# Altium PCB Christmas_PCB_V2.PcbDoc
Units mm, origin at the board's own origin, x right, y up, seen from the top; angles counter-clockwise.
Board outline 38.15 x 54.78 mm, 2 copper layers (Top Layer, Bottom Layer); 21 components, 22 nets, 51 pads, 9 vias.
Unrouted connection lines stored in the file: 9.
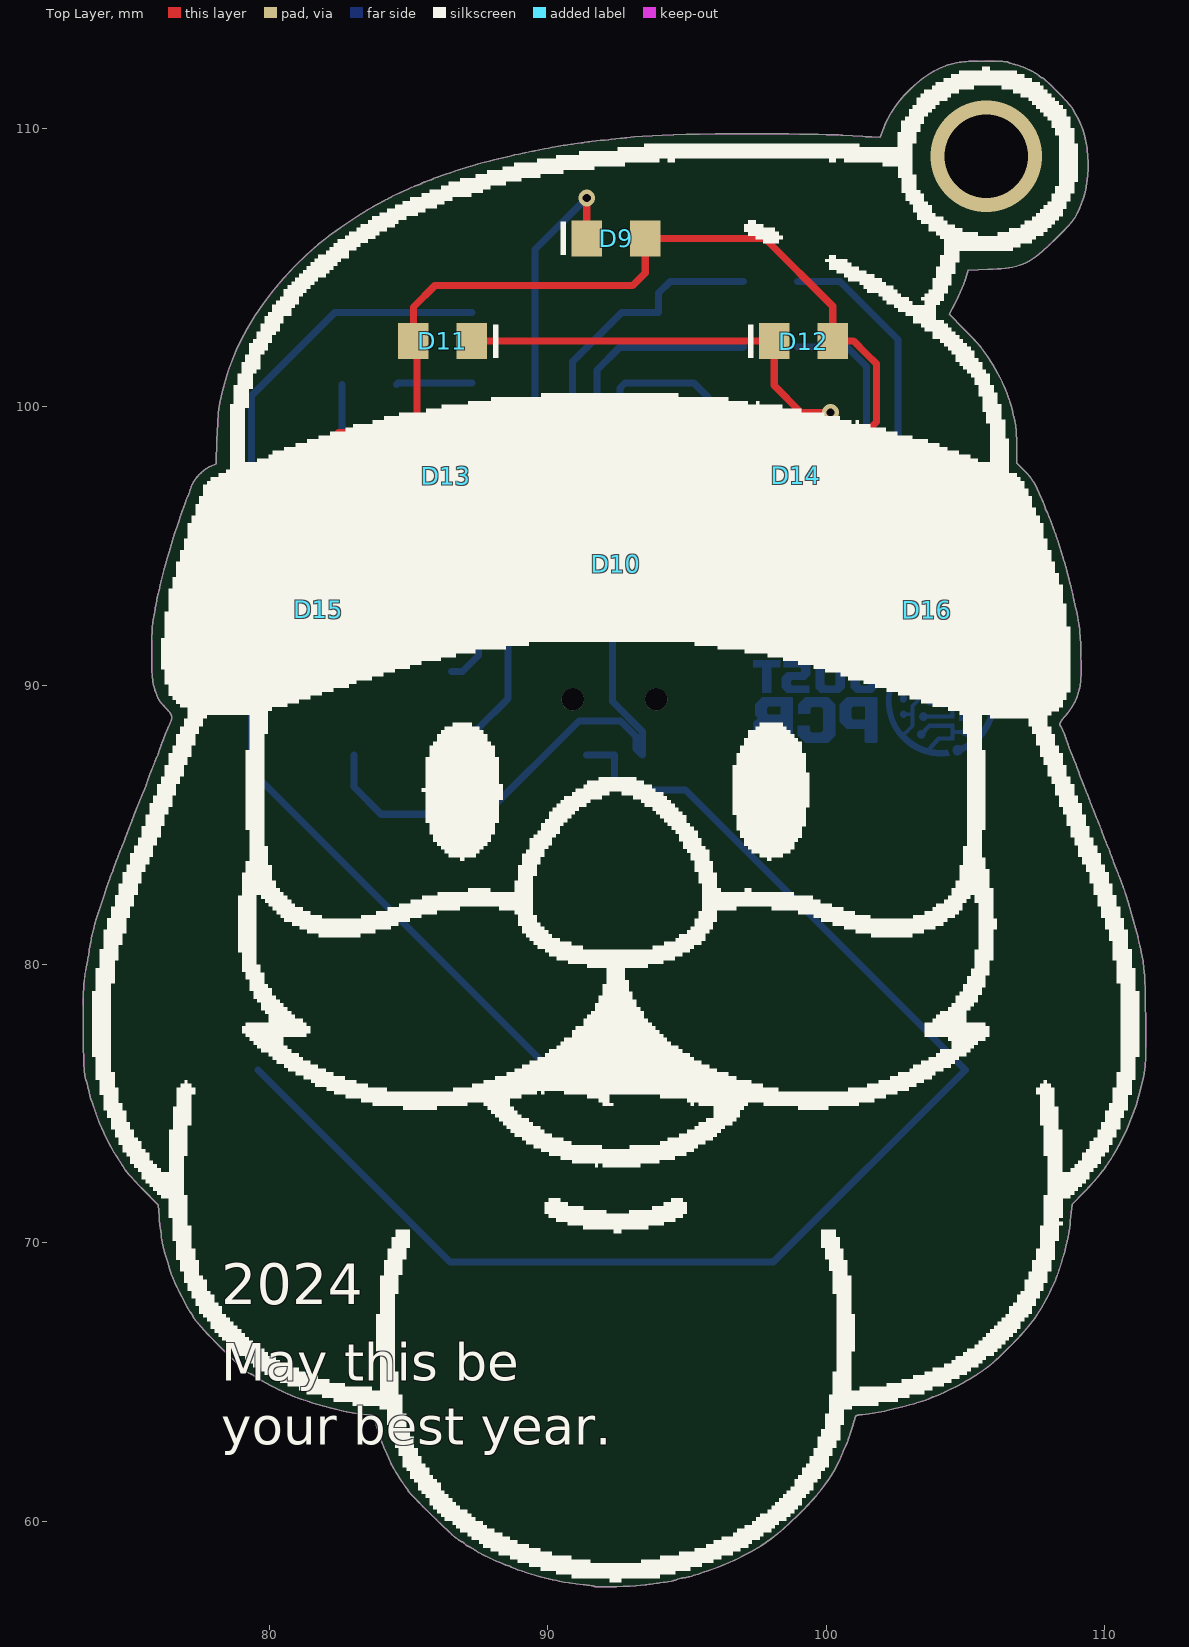
[diagram p0: Top Layer view]
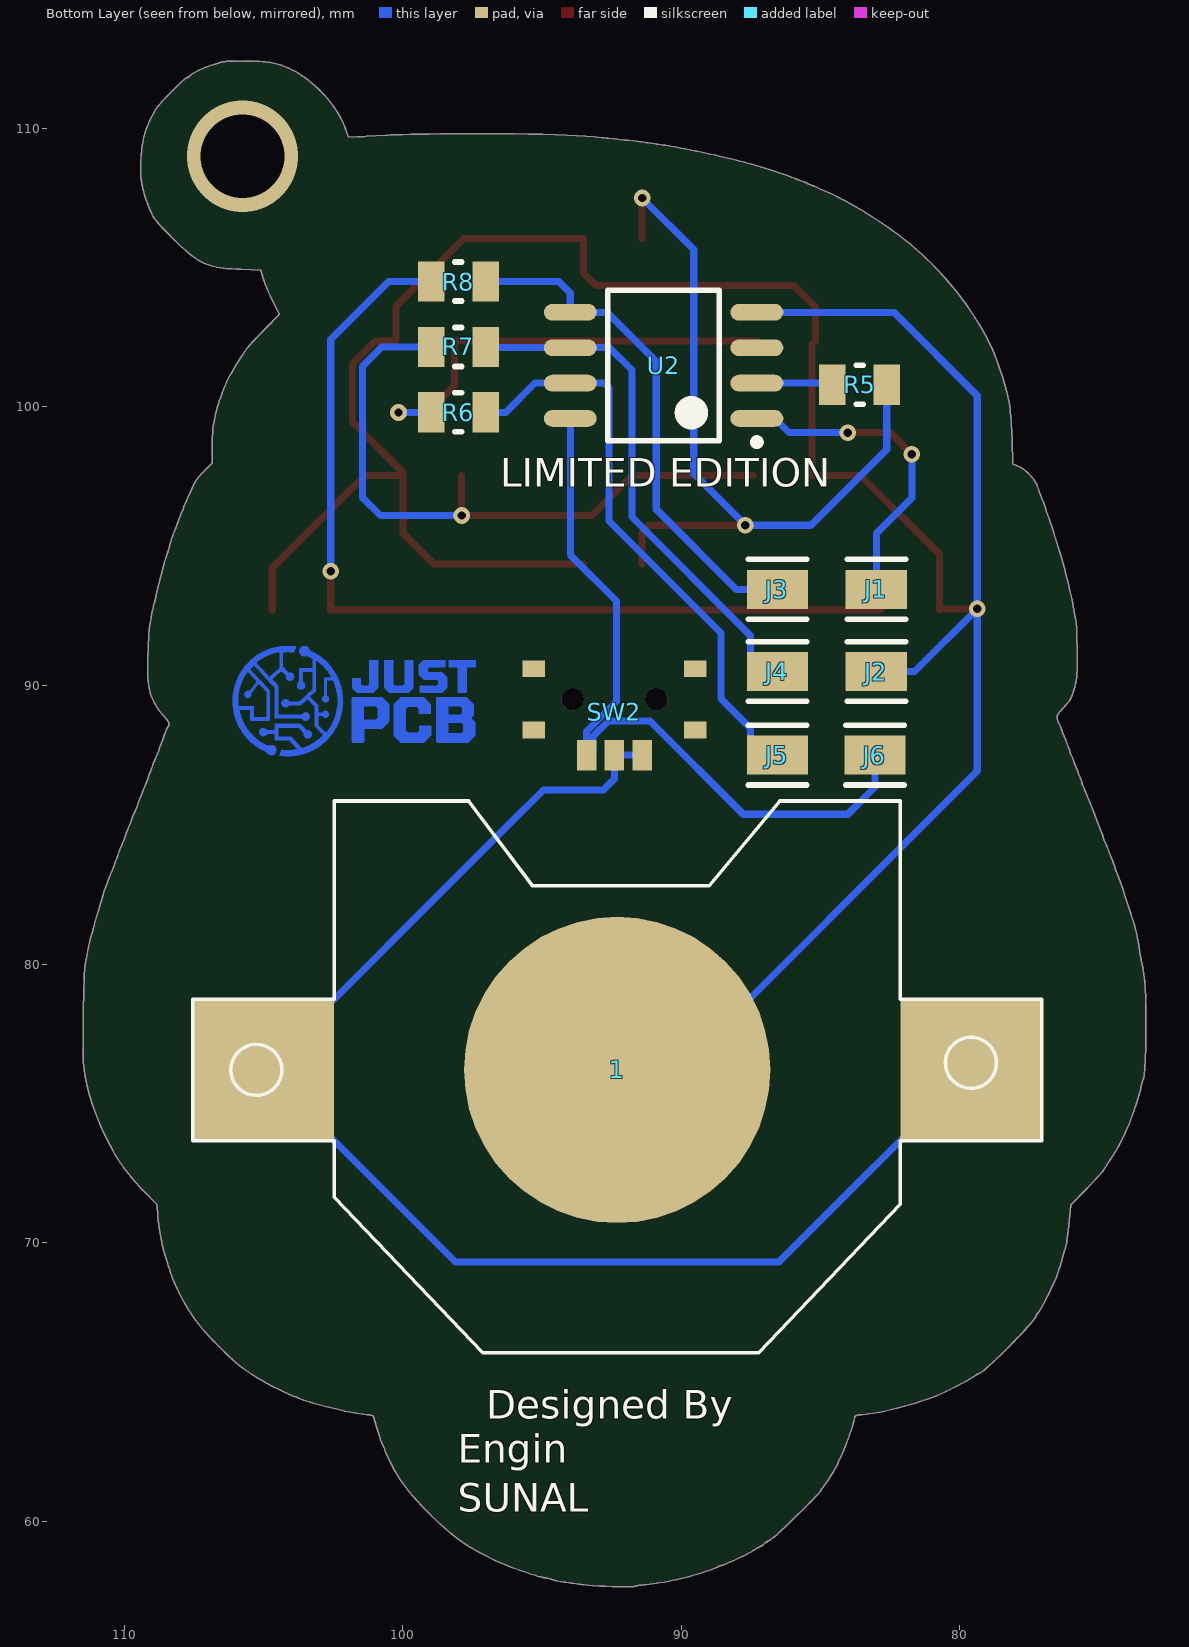
[diagram p1: Bottom Layer view, seen from below]
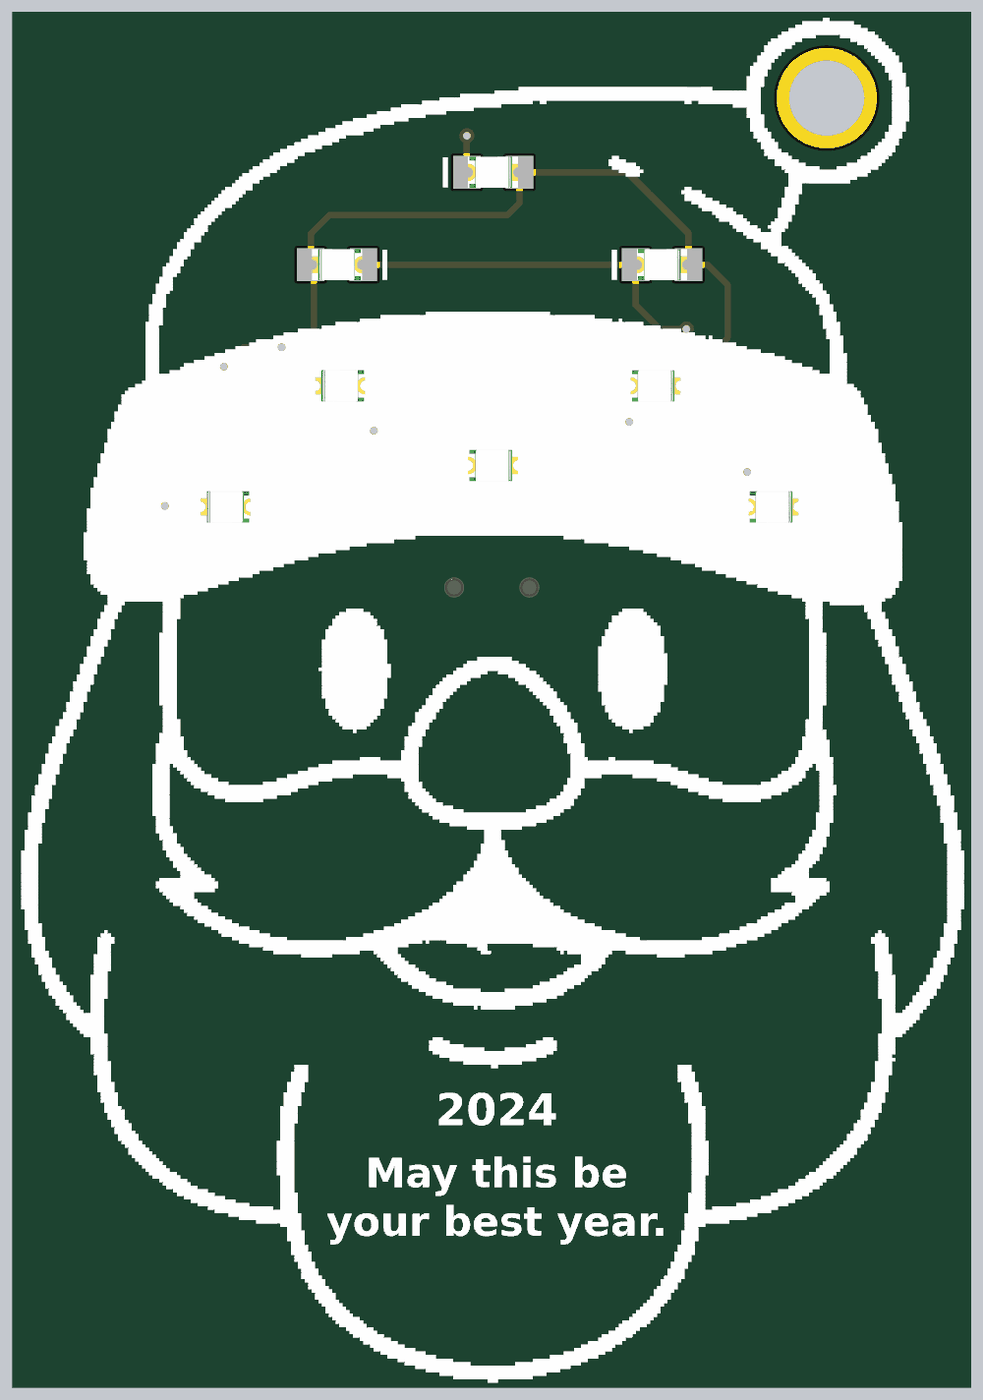
[diagram p2: 3D render of the assembled board from above, using the file's embedded part models]
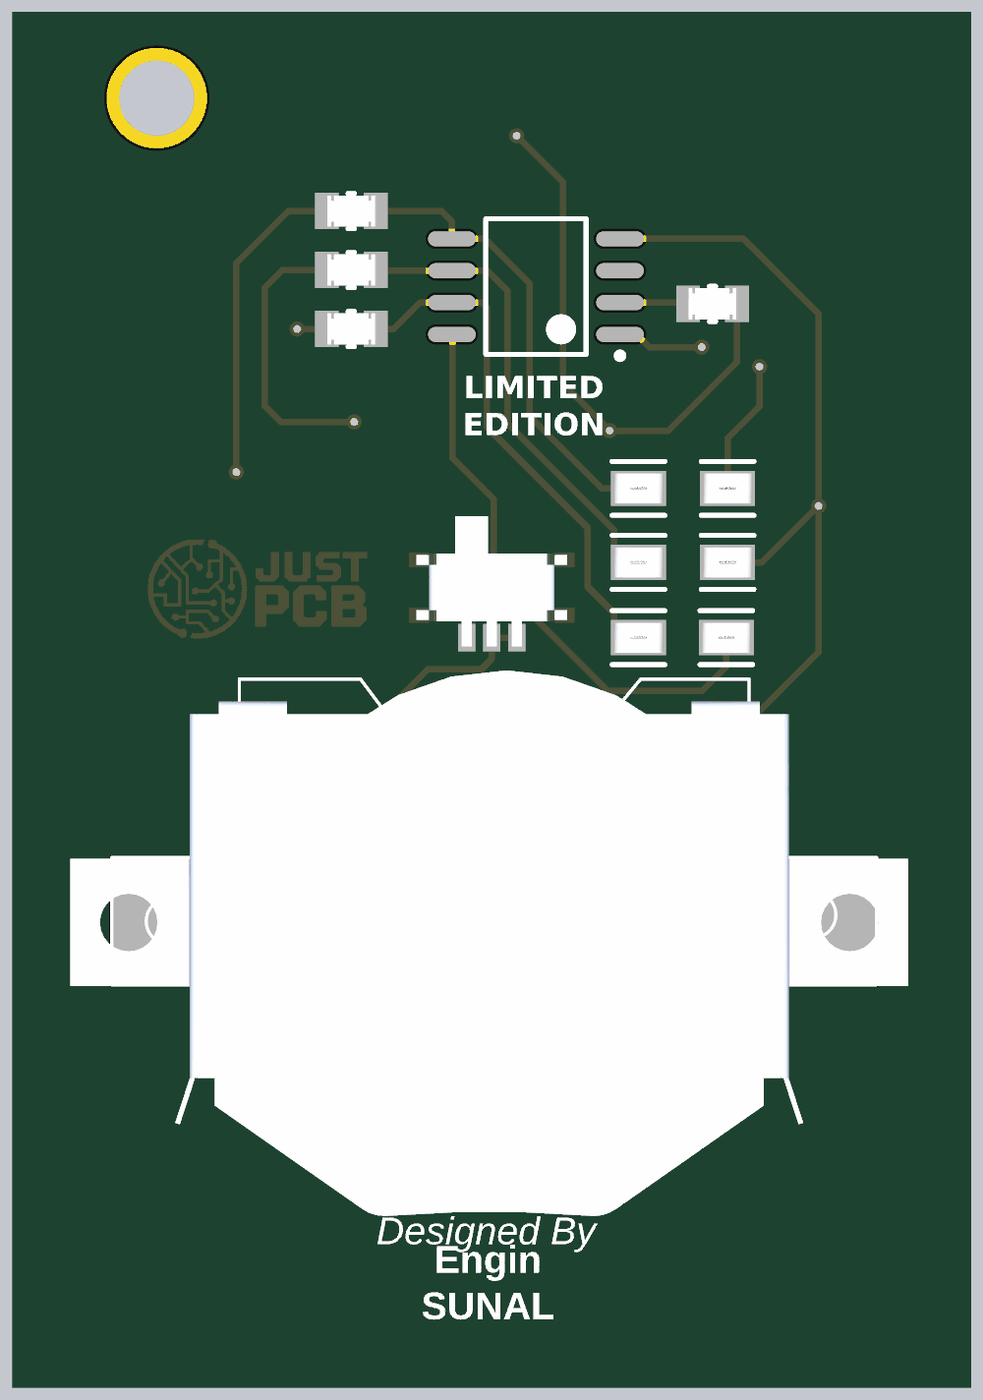
[diagram p3: 3D render of the assembled board from below, using the file's embedded part models]

## Layer stack, top to bottom
Top Solder: solder mask 0.0102, Solder Resist, Dk 3.5
Top Layer: signal copper 0.0356
Dielectric 1: dielectric 0.32, FR-4, Dk 4.8
Bottom Layer: signal copper 0.0356
Bottom Solder: solder mask 0.0102, Solder Resist, Dk 3.5

## Board outline
977 vertices, not listed, extent 73.324,57.639 111.475,112.414

## Design rules (kind name [scope] priority, off if disabled: settings)
Clearance [All] p1: gap=0.254 ignorepadtopadclearanceinfootprint=FALSE except(0: Arc-Hole Track-Hole SMDPad-Hole THPad-Hole Via-Hole Fill-Hole Poly-Hole Region-Hole Text-Hole)
PolygonConnect [All] p1: connectstyle=Relief reliefconductorwidth=0.254 reliefentries=4 polygonreliefangle="90 Angle" airgapwidth=0.254
RoutingVias [All] p1: holewidth=0.711 width=1.27 viastyle="Through Hole" minholewidth=0.711 minwidth=1.27 maxholewidth=0.711 maxwidth=1.27
SilkToSolderMaskClearance [IsPad] p1: minsilkscreentomaskgap=0.1 clearancetoexposedcopper=TRUE
SolderMaskExpansion [All] p1: expansion=0.102 istentingtop=FALSE
Width [All] p1: maxlimit=0.254 minlimit=0.1 preferedwidth=0.254 minimp=50.000000 maximp=50.000000 favimp=50.000000
29 further rules are at their usual default settings.

## Components (designator, comment, footprint, x,y, rotation, side; value= is the part's Value field where it differs from the comment)
1 "CR2032" CR2032-SMD 92.3,76.2 r180 bottom
D9 "150080RS75000" WL-SMCW_0805_150080xx75000 92.456,106.045 r0 top
D10 "150080RS75000" WL-SMCW_0805_150080xx75000 92.456,94.361 r0 top
D11 "150080RS75000" WL-SMCW_0805_150080xx75000 86.233,102.362 r180 top
D12 "150080RS75000" WL-SMCW_0805_150080xx75000 99.187,102.362 r0 top
D13 "150080RS75000" WL-SMCW_0805_150080xx75000 86.36,97.536 r180 top
D14 "150080RS75000" WL-SMCW_0805_150080xx75000 98.933,97.536 r0 top
D15 "150080RS75000" WL-SMCW_0805_150080xx75000 81.788,92.71 r180 top
D16 "150080RS75000" WL-SMCW_0805_150080xx75000 103.632,92.71 r0 top
J1 "S2751-46R" FP-S2751-46R-MFG 83,93.45 r180 bottom
J2 "S2751-46R" FP-S2751-46R-MFG 83,90.5 r180 bottom
J3 "S2751-46R" FP-S2751-46R-MFG 86.55,93.45 r180 bottom
J4 "S2751-46R" FP-S2751-46R-MFG 86.55,90.5 r180 bottom
J5 "S2751-46R" FP-S2751-46R-MFG 86.55,87.5 r180 bottom
J6 "S2751-46R" FP-S2751-46R-MFG 83.05,87.5 r180 bottom
R5 "CRCW0805330RFKEA" FP-CRCW0805-e3-MFG 83.6,100.8 r180 bottom
R6 "CRCW0805330RFKEA" FP-CRCW0805-e3-MFG 98,99.8 r0 bottom
R7 "CRCW0805330RFKEA" FP-CRCW0805-e3-MFG 98,102.15 r0 bottom
R8 "CRCW0805330RFKEA" FP-CRCW0805-e3-MFG 98,104.5 r0 bottom
SW2 "CUS-12TB" CUS-12TB_NDC 92.2,89.4 r0 bottom
U2 "ATtiny13A-SU" 8S2_L 90.637,101.489 r0 bottom

## Footprints (in the part's own frame and the unit in brackets; to place one, negate y for a bottom-side part, rotate by r counter-clockwise, add the part's x,y. Pads: shape width x height; smd on the part's side, far side on the other; paste and mask are expansions set on the pad)
8S2_L [mm] "SOP, 8-Leads, Body 5.3x5.3mm, Pitch 1.27mm, IPC High Density"
  oval 1.9x0.6 smd: 1(-3.35,1.905) 2(-3.35,0.635) 3(-3.35,-0.635) 4(-3.35,-1.905) 5(3.35,-1.905) 6(3.35,-0.635) 7(3.35,0.635) 8(3.35,1.905)
  silkscreen extent -3.47,-2.7 2,2.88, body extent -2.7,-2.68 2.7,2.68, height 2.16
CR2032-SMD [mil]
  rect 200x200 smd: +$1(-500,0) +$2(500,0)
  rect 160x160 smd: NEG(0,0)
  silkscreen extent -600,-400 600,380, body extent -665,-463 650,394, height 170
CUS-12TB_NDC [mm]
  rect 0.7x1.1 smd paste+0 mask+0: 1(-0.8,1.9) 2(0.2,1.9) 3(1.2,1.9)
  round 0.8 / inner round 1.524 / far side round 0.8 hole 0.8 unplated paste-2539.97 mask-0.47: 4(-1.3,-0.1) 5(1.7,-0.1)
  rect 0.8x0.6 smd paste-0.495 mask-0.495: 6(-2.7,1) 7(3.1,1) 8(-2.7,-1.2) 9(3.1,-1.2)
  body extent -2.8,-2.95 3.2,2.25, height 1.4
FP-CRCW0805-e3-MFG [mm]
  rect 0.95x1.45 smd paste+0 mask+0: 1(-0.975,0) 2(0.975,0)
  silkscreen extent -0.13,-0.7 0.13,0.7, body extent -1,-0.63 1,0.63, height 0.5
FP-S2751-46R-MFG [mm]
  rect 2.2x1.4 smd paste+0 mask+0: 1(0,0)
  silkscreen extent -1.05,-1.07 1.05,1.07, body extent -1,-0.6 1,0.6, height 1.5
WL-SMCW_0805_150080xx75000 [mm] "SMD Mono-color Chip LED, body 2.0x1.25mm"
  rect 1.1x1.3 smd: 1(-1.05,0) 2(1.05,0)
  silkscreen extent -2,-0.6 -1.8,0.6, body extent -1,-0.63 1,0.62, height 0.7

## Part data
1: "Coin, 20.0mm Lithium Manganese Dioxide 3V Battery Non-Rechargeable _Primary_", Package=FDK, Availability=Unavailable, MF="FDK America,", MP=CR2032, Price=None, SnapEDA_Link=https://www.snapeda.com/parts/CR2032/FDK%20America%2C%20Inc.%2C%20a%20member%20of%20Fujitsu%20Group/view-part/1775317/?ref=snap
D9 D10 D11 D12 D13 D14 D15 D16: library part CMP-1426-00011-2, Case Code (Metric)=2012, Case Code (Imperial)=0805, Color=Red, Forward Current=100mA, Forward Voltage=2V, Max Operating Temperature=85°C, Max Reverse Voltage (DC)=5V, Min Operating Temperature=-40°C, Test Current=20mA, Case/Package=0805, Dominant Wavelength=625nm, Height=700µm, Length=2mm, Lens Style="Clear, Rectangular", Luminous Intensity=150mcd, Mount="Surface Mount", NexarPartId=29717781, Packaging="Tape and Reel", Peak Wavelength=630nm, REACH SVHC=Unknown, RoHS=Compliant, Viewing Angle=140°, Wavelength=625nm, Width=1.25mm
J1 J2 J3 J4 J5 J6: library part CMP-15817-000010-1, "PC TEST POINT NATURAL", Color=Natural, Body Material=Brass, Material="Copper Alloy", Mount="Surface Mount", Packaging="Cut Tape", Plating=Tin
R5 R6 R7 R8: library part CMP-2001-03823-2, "RES Thick Film, 330Ω, 1%, 0.125W, 100ppm/°C, 0805", Case Code (Metric)=2012, Case Code (Imperial)=0805, Max Operating Temperature=155°C, Max Power Dissipation=125mW, Min Operating Temperature=-55°C, Package Quantity=10, Resistance=330R, Temperature Coefficient=100ppm/°C, Tolerance=1%, Voltage Rating=150V, Case/Package=0805, Composition="Thick Film", Contact Plating=Tin, Depth=1.25mm, Features="Automotive AEC-Q200", Height=0.02inch, Lead Free="Lead Free", Length=2mm, Military Standard=Not, Mount="Surface Mount", Number of Terminations=2, Packaging="Tape and Reel", Power Rating=125mW, Termination=SMD/SMT, Voltage Rating (DC)=150V, Weight=0.000194oz, Width=0.049inch
SW2: "No Description Available", Mfr_Name="Nidec Copal Electronics", Copyright="Copyright (C) 2023 Ultra Librarian. All rights reserved.", Digi-Key_Part_Number_1=563-1102-2-ND, Digi-Key_Part_Number_2=563-1102-1-ND, Digi-Key_Part_Number_3=563-1102-6-ND, Digi-Key_Part_Number_4=563-1102-2-NDL, Manufacturer_Part_Number=CUS-12TB, RefDes=RefDes, Type=DEV
U2: library part CMP-0093-00187-2, "8-bit AVR Microcontroller, 1.8-5.5V, 20MHz, 1KB Flash, 64 Bytes EEPROM, 64 Bytes SRAM, 8-pin SOIC, Industrial Grade (-40°C to 85°C), Pb-Free", ComponentLink1Description="Manufacturer URL", ComponentLink1URL=http://www.atmel.com/, ComponentLink2Description="ATtiny13A Datasheet", ComponentLink2URL=http://www.atmel.com/dyn/resources/prod_documents/doc8126.pdf, ComponentLink3Description="ATtiny13A Summary", ComponentLink3URL=http://www.atmel.com/dyn/resources/prod_documents/8126S.pdf, DatasheetVersion="revE, Jul-2010", PackageDescription="8-Lead, 0.208\" Body, Plastic Small Outline Package (EIAJ)", PackageReference=8S2, PackageVersion="revF, Apr-2008", RevisionNote="DatasheetVersion updated. URLs added."

## Free pads (board coordinates)
  round 11 smd far side: 2(92.3,76.2)

## Via types
v1: diameter 0.6, hole 0.3, Top Layer to Bottom Layer, tented both sides, 8 vias
v2: diameter 4, hole 3, Top Layer to Bottom Layer, 1 vias

## Nets (pads, with @x,y where several pads share a name; then routed paths per layer and width w, separated by ;. In a path a pad name is that pad's centre, name@x,y a point inside that pad or via, vN(x,y) a via of type N, cw(c..) or ccw(c..) an arc to the next point about the centre after c; other vN are vias at no path point)
GND: 1.NEG D9.2 D10.2 D11.2 D12.2 D13.2 D14.2 D15.2 D16.2 J2.1 pad.2 U2.4 | length 102.1
  Top Layer w0.254: v1(79.375,92.75) 80.698,92.75 D15.2 80.738,94.713 83.561,97.536 D13.2 85.31,102.235 D11.2 85.183,103.583 85.95,104.35 93.05,104.35 93.506,104.806 D9.2 97.805,106.045 100.237,103.613 D12.2 100.987,102.362 101.449,101.9 ; D10.2 98.886,94.361 99.983,95.458 D14.2 ; 101.45,101.9 101.8,101.55 101.8,99.453 99.983,97.636 D14.2 ; D16.2 104.682,94.218 101.364,97.536 D14.2
  Bottom Layer w0.254: J2.1 81.625,90.5 v1(79.375,92.75) ; U2.4 82.369,103.394 79.375,100.4 v1(79.375,92.75) ; 1.NEG 90.1,76.2 79.375,86.925 v1(79.375,92.75)
Net1_+$1: 1.+$1 1.+$2 SW2.1 SW2.2 | length 49.9
  Bottom Layer w0.254: 1.+$2 86.5,69.3 98.1,69.3 1.+$1 96.175,85.025 94.95,86.25 92.8,86.25 92.4,86.65 SW2.2 SW2.1
Net_+$1: 
NetD1_1: 
NetD3_1: 
NetD5_1: 
NetD7_1: 
NetD9_1: D9.1 D10.1 R5.2 | length 28.2
  Top Layer w0.254: v1(87.7,95.75) 91.15,95.75 91.406,95.494 D10.1 ; D9.1 v1(91.406,107.5)
  Bottom Layer w0.254: R5.2 82.625,98.475 85.35,95.75 v1(87.7,95.75) 89.553,97.603 89.553,105.647 v1(91.406,107.5)
NetD11_1: D11.1 D12.1 R6.2 | length 16
  Top Layer w0.254: D11.1 D12.1 98.137,100.763 99.1,99.8 v1(100.154,99.8)
  Bottom Layer w0.254: R6.2 v1(100.154,99.8)
NetD13_1: D13.1 D14.1 R7.2 | length 23.8
  Top Layer w0.254: D13.1 91.764,97.536 93.2,96.1 v1(97.883,96.1) D14.1
  Bottom Layer w0.254: v1(97.883,96.1) 100.8,96.1 101.45,96.75 101.45,101.45 100.75,102.15 R7.2
NetD15_1: D15.1 D16.1 R8.2 | length 33.9
  Top Layer w0.254: D15.1 D16.1 v1(102.582,94.1)
  Bottom Layer w0.254: R8.2 100.5,104.5 102.582,102.418 v1(102.582,94.1)
NetR1_1: 
NetR2_1: 
NetR3_1: 
NetR4_1: 
NetR5_1: R5.1 U2.2 | length 2.7
  Bottom Layer w0.254: R5.1 84.629,100.854 U2.2
NetSW1_1: 
TP1: J1.1 U2.1 | length 11.5
  Top Layer w0.254: v1(81.725,98.3) 82.5,99.075 v1(84.025,99.075)
  Bottom Layer w0.254: v1(81.725,98.3) 81.725,96.725 83,95.45 J1.1 ; v1(84.025,99.075) 86.128,99.075 86.637,99.584 U2.1
TP5: J3.1 R8.1 U2.5 | length 18.6
  Bottom Layer w0.254: J3.1 88.025,93.45 90.9,96.325 90.9,101.625 92.669,103.394 U2.5 93.987,104.087 94.4,104.5 R8.1
TP6: J4.1 R7.1 U2.6 | length 18.8
  Bottom Layer w0.254: J4.1 86.95,90.5 87.523,91.073 87.523,91.798 91.775,96.05 91.775,101.325 92.574,102.124 U2.6 96.999,102.124 R7.1
TP7: J5.1 R6.1 U2.7 | length 20.9
  Bottom Layer w0.254: J5.1 86.95,87.5 87.523,88.073 87.523,88.473 88.575,89.525 88.575,91.88 92.6,95.905 92.6,100.675 92.779,100.854 U2.7 95.246,100.854 96.3,99.8 R6.1
TP8: J6.1 SW2.3 U2.8 | length 27.3
  Bottom Layer w0.254: J6.1 83.05,86.35 84.025,85.375 87.775,85.375 91.125,88.725 92.614,88.725 93.177,88.162 93.177,87.723 SW2.3 93.4,88.35 92.325,89.425 92.325,93.025 93.975,94.675 93.975,99.572 U2.8
pads on no net: SW2.4 SW2.5 SW2.6 SW2.7 SW2.8 SW2.9 U2.3
copper on no net:
  other v2: 105.75,109

## Keep-outs
Keep-Out Layer:
  the board outline again, w0.013

## Other copper
Bottom Layer:
  region: 230 vertices and 2 holes, not listed, extent 97.392,87.943 98.794,89.579
  region: 260 vertices and 0 holes, not listed, extent 99.621,89.74 100.663,90.909
  region: 189 vertices and 0 holes, not listed, extent 98.398,89.74 99.423,90.909
  region: 1101 vertices and 1 holes, not listed, extent 102.137,87.457 105.157,91.412
  region: 1114 vertices and 2 holes, not listed, extent 103.342,87.493 106.128,91.412
  region: 188 vertices and 0 holes, not listed, extent 100.879,89.74 101.814,90.909
  region: 97.374,90.891 97.374,90.873 97.374,90.855 97.374,90.837 97.374,90.819 97.374,90.801 97.374,90.783 97.374,90.765 97.374,90.747 97.374,90.729 97.374,90.711 97.374,90.693 97.374,90.675 97.374,90.657 97.697,90.657 97.697,90.639 97.697,90.621 97.697,90.603 97.697,90.585 97.697,90.567 97.697,90.549 97.697,90.531 97.697,90.513 97.697,90.495 97.697,90.477 97.697,90.459 97.697,90.441 97.697,90.423 97.697,90.406 97.697,90.388 97.697,90.37 97.697,90.352 97.697,90.334 97.697,90.316 97.697,90.298 97.697,90.28 97.697,90.262 97.697,90.244 97.697,90.226 97.697,90.208 97.697,90.19 97.697,90.172 97.697,90.154 97.697,90.136 97.697,90.118 97.697,90.1 97.697,90.082 97.697,90.064 97.697,90.046 97.697,90.028 97.697,90.01 97.697,89.992 97.697,89.974 97.697,89.956 97.697,89.938 97.697,89.92 97.697,89.902 97.697,89.884 97.697,89.866 97.697,89.848 97.697,89.83 97.697,89.812 97.697,89.794 97.697,89.776 97.697,89.758 97.697,89.74 98.021,89.74 98.021,89.758 98.021,89.776 98.021,89.794 98.021,89.812 98.021,89.83 98.021,89.848 98.021,89.866 98.021,89.884 98.021,89.902 98.021,89.92 98.021,89.938 98.021,89.956 98.021,89.974 98.021,89.992 98.021,90.01 98.021,90.028 98.021,90.046 98.021,90.064 98.021,90.082 98.021,90.1 98.021,90.118 98.021,90.136 98.021,90.154 98.021,90.172 98.021,90.19 98.021,90.208 98.021,90.226 98.021,90.244 98.021,90.262 98.021,90.28 98.021,90.298 98.021,90.316 98.021,90.334 98.021,90.352 98.021,90.37 98.021,90.388 98.021,90.406 98.021,90.423 98.021,90.441 98.021,90.459 98.021,90.477 98.021,90.495 98.021,90.513 98.021,90.531 98.021,90.549 98.021,90.567 98.021,90.585 98.021,90.603 98.021,90.621 98.021,90.639 98.021,90.657 98.326,90.657 98.326,90.675 98.344,90.675 98.344,90.693 98.344,90.711 98.344,90.729 98.344,90.747 98.344,90.765 98.344,90.783 98.344,90.801 98.344,90.819 98.344,90.837 98.344,90.855 98.344,90.873 98.344,90.891 98.344,90.909 97.374,90.909
  region: 219 vertices and 1 holes, not listed, extent 100.483,87.943 101.832,89.579
  region: 317 vertices and 0 holes, not listed, extent 98.974,87.943 100.322,89.579

## Silkscreen, mask and mechanical layers (free items; w line width, h text height)
Top Overlay:
  drawing of 5 lines, arcs and shapes, not listed
  text "2024" at 78.284,67.3 h2.5
  text "May this be / your best year." at 78.284,62.3 h2.3
Bottom Overlay:
  text "LIMITED EDITION" at 96.5,96.8 h1.75
  text "Designed By" at 97,63.33 h1.75
  text "Engin / SUNAL" at 98.029,60 h1.75